# Altium PCB main_pcb.PcbDoc
Units mm, origin at the board's own origin, x right, y up, seen from the top; angles counter-clockwise.
Board outline 20 x 50 mm, 2 copper layers (Top Layer, Bottom Layer); 9 components, 7 nets, 48 pads, 0 vias.
Unrouted connection lines stored in the file: 17.
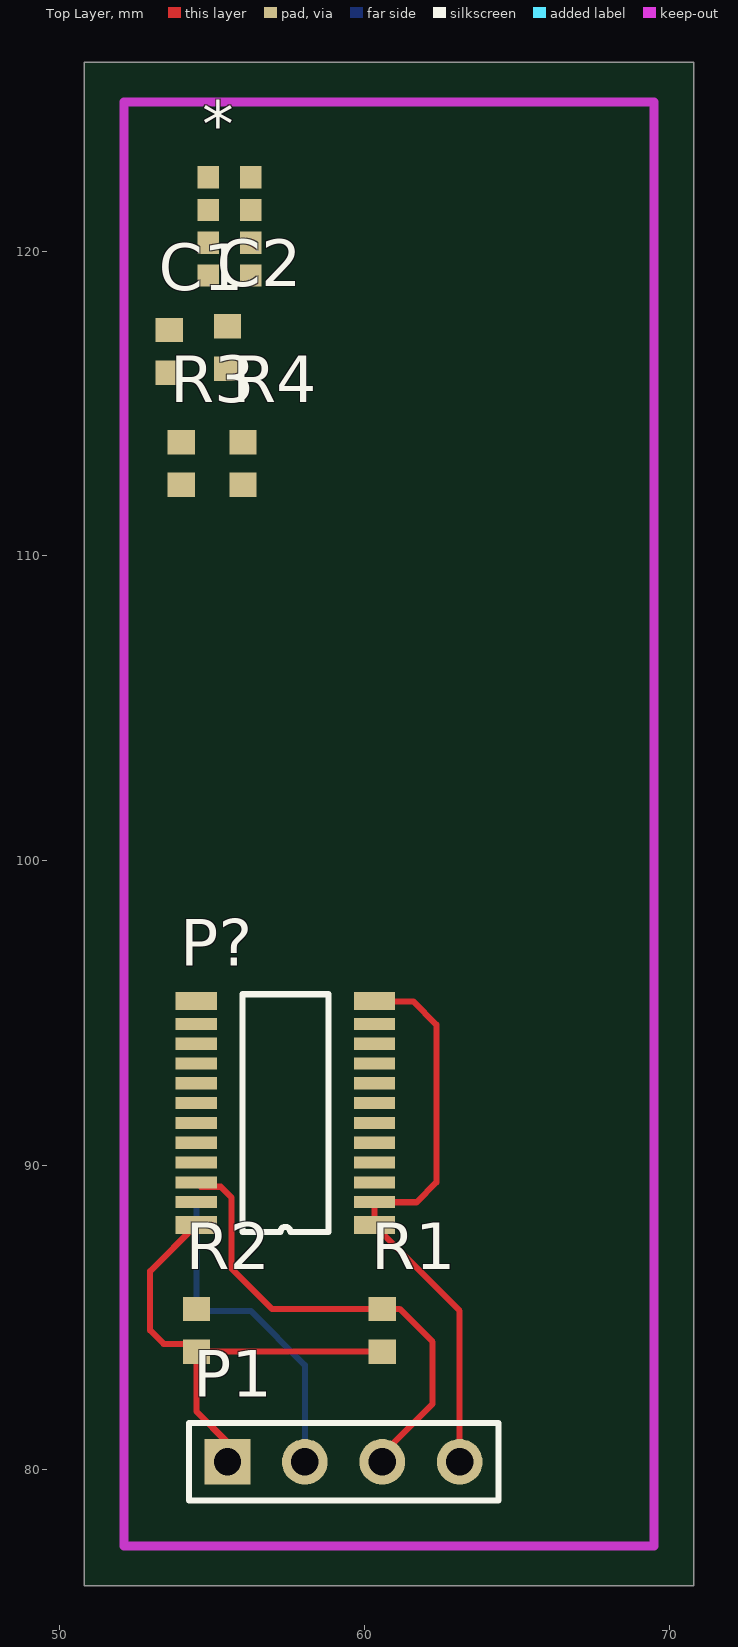
[diagram p0: Top Layer view]
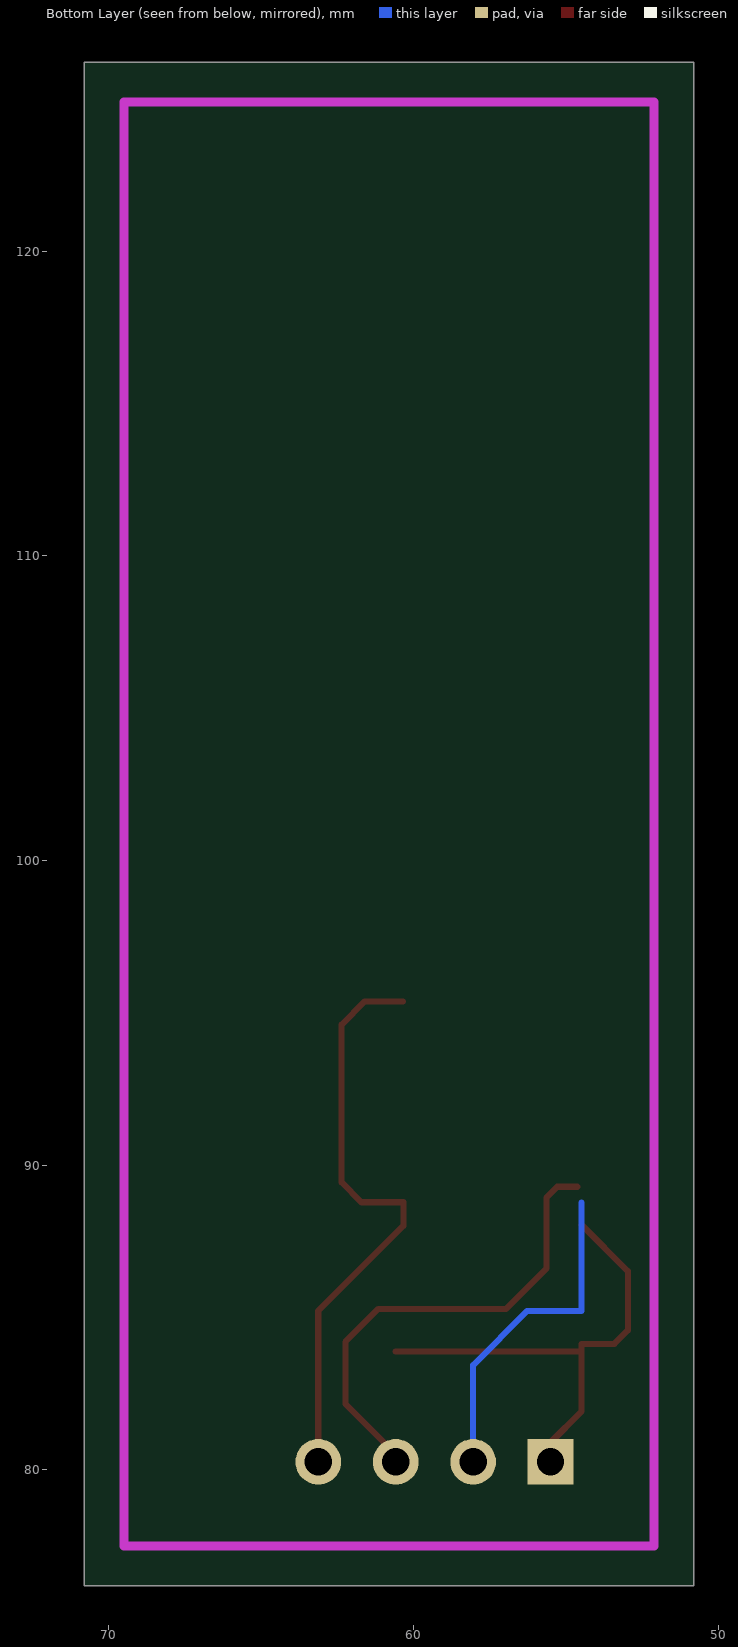
[diagram p1: Bottom Layer view, seen from below]

## Layer stack, top to bottom
Top Solder: solder mask 0.0102, Solder Resist, Dk 3.5
Top Layer: signal copper 0.0356
Dielectric 1: dielectric 0.32, FR-4, Dk 4.8
Bottom Layer: signal copper 0.0356
Bottom Solder: solder mask 0.0102, Solder Resist, Dk 3.5

## Board outline
50.8,76.2 70.8,76.2 70.8,126.2 50.8,126.2

## Design rules (kind name [scope] priority, off if disabled: settings)
Clearance [All] p1: gap=0.203
PolygonConnect [All] p1: connectstyle=Relief reliefconductorwidth=0.254 reliefentries=4 polygonreliefangle="90 Angle" airgapwidth=0.254
RoomDefinition main_schematic [InComponentClass('main_schematic')] p1: confinementstyle=ConfineIn formatcopy=TRUE lockcomponents=FALSE outline 72.009,77.724 114.681,77.724 114.681,92.202 72.009,92.202
RoutingVias [All] p1: holewidth=0.635 width=1.016 viastyle="Through Hole" minholewidth=0.711 minwidth=1.27 maxholewidth=0.711 maxwidth=1.27
SolderMaskExpansion [All] p1: expansion=0.102
Width [All] p1: maxlimit=0.203 minlimit=0.203 preferedwidth=0.203
29 further rules are at their usual default settings.

## Components (designator, comment, footprint, x,y, rotation, side; value= is the part's Value field where it differs from the comment)
* "VCNL4040" SOP8 54.864,122.428 r0 top
C1 "Cap" 1608[0603] 53.594,116.713 r270 top
C2 "Cap" 1608[0603] 55.499,116.84 r270 top
P1 "Header 4" HDR1X4 55.499,80.264 r0 top
P? "PCA9547" TSSOP24 60.325,88.138 r180 top
R1 "Res1" 1608[0603] 60.579,84.582 r270 top
R2 "Res1" 1608[0603] 54.483,84.582 r270 top
R3 "Res1" 1608[0603] 53.975,113.03 r270 top
R4 "Res1" 1608[0603] 56.007,113.03 r270 top

## Footprints (in the part's own frame and the unit in brackets; to place one, negate y for a bottom-side part, rotate by r counter-clockwise, add the part's x,y. Pads: shape width x height; smd on the part's side, far side on the other; paste and mask are expansions set on the pad)
1608[0603] [mm] "Chip Capacitor, Body 1.6x0.8mm, IPC High Density"
  rect 0.8x0.9 smd: 1(-0.7,0) 2(0.7,0)
  body extent -0.87,-0.48 0.87,0.48, height 1.3
HDR1X4 [mm] "Connector; Header; 4 Position"
  rect 1.5x1.5 hole 0.9: 1(0,0)
  round 1.5 hole 0.9: 2(2.54,0) 3(5.08,0) 4(7.62,0)
  silkscreen extent -1.27,-1.27 8.89,1.27
SOP8 [mm]
  rect 0.7x0.725 smd: 1(0,0) 2(0,-1.075) 3(0,-2.15) 4(0,-3.225) 5(1.4,-3.225) 6(1.4,-2.15) 7(1.4,-1.075) 8(1.4,0)
TSSOP24 [mm]
  rect 1.35x0.6 smd: 1(0,0.1) 12(0,-7.25) 13(5.85,-7.25) 24(5.85,0.1)
  rect 1.35x0.4 smd: 2(0,-0.65) 3(0,-1.3) 4(0,-1.95) 5(0,-2.6) 6(0,-3.25) 7(0,-3.9) 8(0,-4.55) 9(0,-5.2) 10(0,-5.85) 11(0,-6.5) 14(5.85,-6.5) 15(5.85,-5.85) 16(5.85,-5.2) 17(5.85,-4.55) 18(5.85,-3.9) 19(5.85,-3.25) 20(5.85,-2.6) 21(5.85,-1.95) 22(5.85,-1.3) 23(5.85,-0.65)
  silkscreen extent 1.51,-7.48 4.34,0.33

## Part data
*: library part Component_1
C1 C2: "Capacitor"
P1: "Header, 4-Pin"
R1 R2 R3 R4: "Resistor"

## Nets (pads, with @x,y where several pads share a name; then routed paths per layer and width w, separated by ;. In a path a pad name is that pad's centre, name@x,y a point inside that pad or via, vN(x,y) a via of type N, cw(c..) or ccw(c..) an arc to the next point about the centre after c; other vN are vias at no path point)
GND: *.1 C1.1 C2.1 P1.4 P?.1 P?.2 P?.12 P?.21 | length 19.5
  Top Layer w0.203: P?.12@60.336,95.377 61.595,95.377 62.357,94.615 62.357,89.438 61.707,88.788 P?.2 P?.1 60.325,88.011 63.119,85.217 P1.4
Net*_2: *.2 *.5
Net*_3: *.3 *.4 C1.2 C2.2 P1.1 P?.24 R1.2 R2.2 R3.2 R4.2 | length 16.2
  Top Layer w0.203: P?.24 52.959,86.522 52.959,84.582 53.405,84.136 54.483,84.136 R2.2 ; P1.1 55.499,80.899 54.483,81.915 R2.2 ; R1.2 R2.2
Net*_7: *.7 P?.4 R3.1
Net*_8: *.8 P?.5 R4.1
NetP1_2: P1.2 P?.23 R2.1 | length 11
  Bottom Layer w0.203: 54.483,88.773 54.483,85.217 56.261,85.217 58.039,83.439 P1.2
NetP1_3: P1.3 P?.22 R1.1 | length 15.7
  Top Layer w0.203: P?.22@54.62,89.293 55.276,89.293 55.626,88.943 55.626,86.614 56.958,85.282 R1.1 61.149,85.282 62.23,84.201 62.23,82.169 60.579,80.518 P1.3
pads on no net: *.6 P?.3 P?.6 P?.7 P?.8 P?.9 P?.10 P?.11 P?.13 P?.14 P?.15 P?.16 P?.17 P?.18 P?.19 P?.20

## Keep-outs
Keep-Out Layer:
  lines w0.3: 52.1,77.5 52.1,124.9 69.5,124.9 69.5,77.5 52.1,77.5

## Silkscreen, mask and mechanical layers (free items; w line width, h text height)
Drill Drawing:
  text ".LEGEND" at 75.88,81.28 h1.52
  text "Drill Drawing." at 75.88,78.74 h1.52

## Dimensions
52.1,77.5 to 52.1,124.9 on Mechanical 1
52.1,77.5 to 69.5,77.5 on Mechanical 1